# EAGLE board Launch_Tower_Ignition_Board_v6-2 (EAGLE 6.2)
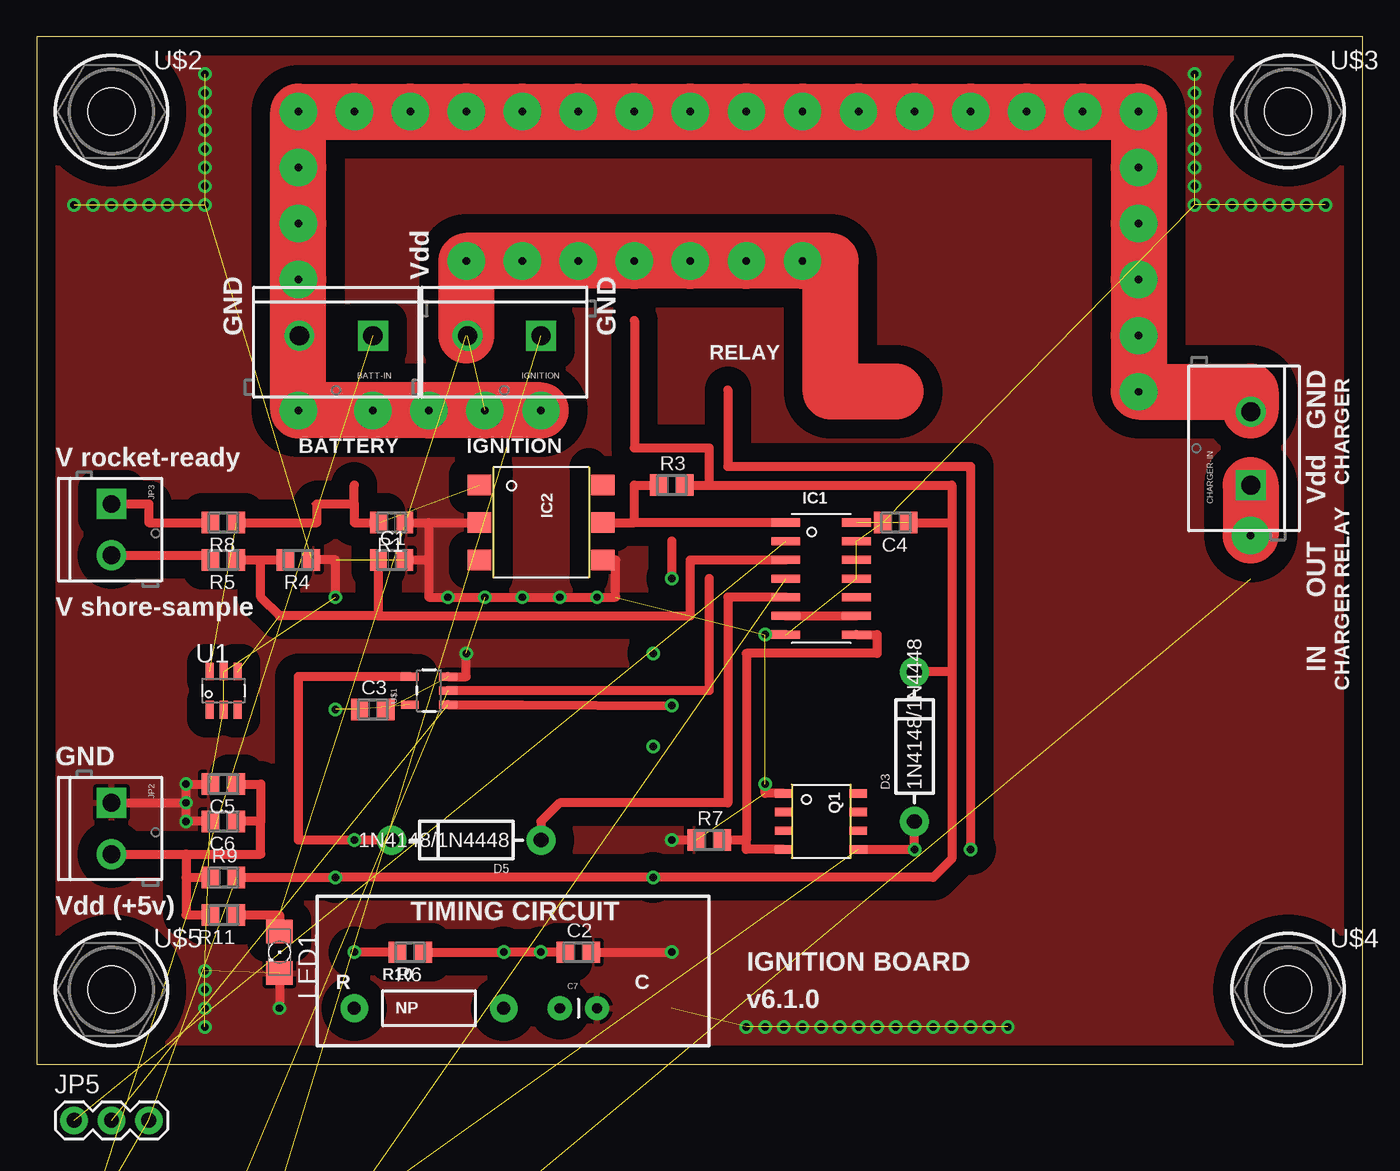
[diagram p0: board, top side]
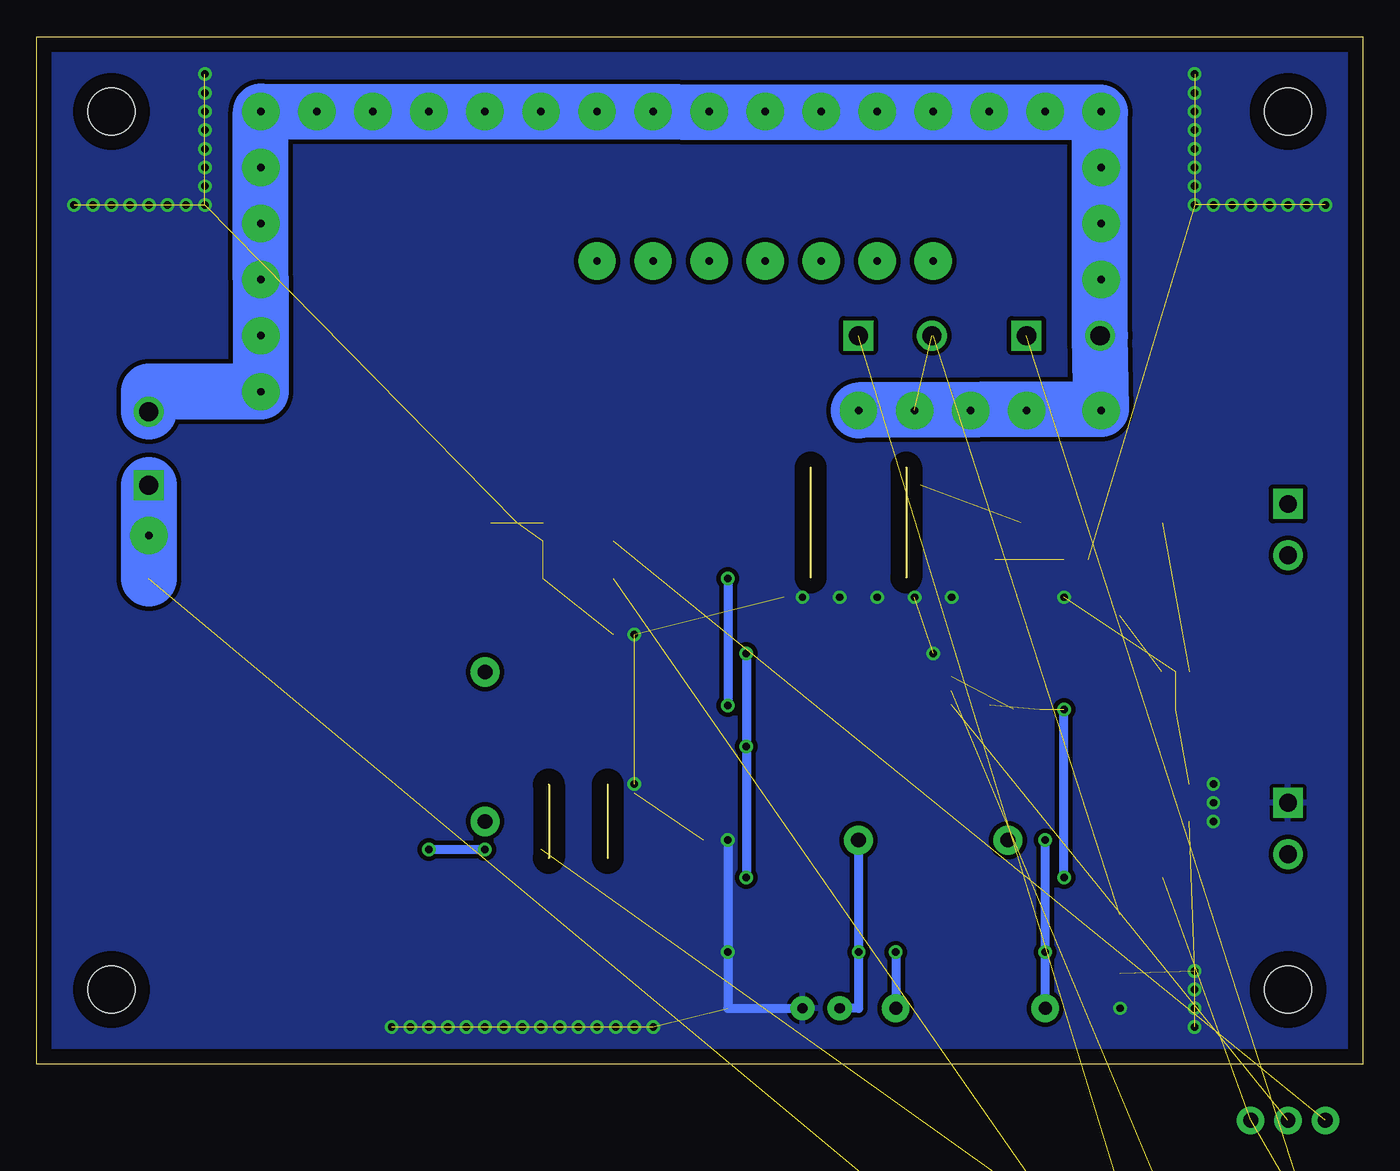
[diagram p1: board, bottom side, seen from below]

Size 90.17 x 69.85 mm. Coordinates in mm from the lower left corner, seen from the top.
Outline: 0,0 90.17,0 90.17,69.85 0,69.85 0,0
Copper layers (1*16): Top 0.035mm / dielectric 1.5mm / Bottom 0.035mm
Design rules: minimum track width 10mil, minimum drill 24mil, track to track 8mil, track to pad 8mil, pad to pad 8mil, via to via 8mil, smd to smd 8mil, copper to edge 40mil, drill to drill 8mil, minimum pad ring 10mil, minimum via ring 8mil, stop-mask expansion 4mil, vias tented up to drill 0mil, thermal gap 10mil

## Footprints (pad centres in the part's own frame; a part is rotated, then mirrored left to right if it is on the bottom)
SCREWTERMINAL-5MM-2 = drill 1.3 pad 2.032 square: 1 0,0 | drill 1.3 pad 2.032: 2 5,0
0805-B-NOSILK = smd 1.15 x 1.45: 1 -0.9,0; 2 0.9,0
CAP-PTH-SMALL = drill 0.7 pad 1.651: 1 0,0; 2 2.54,0
DIODE-1N4001 = drill 1 pad 1.981: A -5.08,0; C 5.08,0
INVERTSOIC14 = smd 0.55 x 1.95: 1 -3.81,-2.4; 2 -2.54,-2.4; 3 -1.27,-2.4; 4 0,-2.4; 5 1.27,-2.4; 6 2.54,-2.4; 7 3.81,-2.4; 8 3.81,2.4; 9 2.54,2.4; 10 1.27,2.4; 11 0,2.4; 12 -1.27,2.4; 13 -2.54,2.4; 14 -3.81,2.4
4N35-300E = smd 1.4 x 1.6: 1 -2.54,-4.2; 2 0,-4.2; 3 2.54,-4.2; 4 2.54,4.2; 5 0,4.2; 6 -2.54,4.2
1X03 = drill 1.016 pad 1.88: 1 0,0; 2 2.54,0; 3 5.08,0
SCREWTERMINAL-3.5MM-2 = drill 1.2 pad 2.032 square: 1 0,0 | drill 1.2 pad 2.032: 2 3.5,0
FKIT-LED-1206 = smd 1.6 x 1.803: A -1.422,0; C 1.422,0
FETSO-8 = smd 0.559 x 1.194: 1 -1.905,-2.527; 2 -0.635,-2.527; 3 0.635,-2.527; 4 1.905,-2.527; 5 1.905,2.527; 6 0.635,2.527; 7 -0.635,2.527; 8 -1.905,2.527
AXIAL-0.4 = drill 0.9 pad 1.88: P$1 -5.08,0; P$2 5.08,0
SOT23-6L = smd 0.55 x 1.2: 1 -0.95,-1.3; 2 0,-1.3; 3 0.95,-1.3; 4 0.95,1.3; 5 0,1.3; 6 -0.95,1.3
SOT23-5 = smd 0.55 x 1.2: 1 -0.95,-1.3; 2 0,-1.3; 3 0.95,-1.3; 4 0.95,1.3; 5 -0.95,1.3
#4/.300-BARE+STD_NUT_OR_STAR_WASHER = hole 3.175: 0,0
G5LA = drill 0.8 square: PIN1 -8.5,0; PIN2 -6.5,5.9; PIN3 5.7,5.9; PIN4 5.7,-6.1; PIN5 -6.5,-6.1

## Placement (x,y rotation side)
BATT-IN  5MM screw  [SCREWTERMINAL-5MM-2]  22.86,49.53 180 top
C1  .1uF  [0805-B-NOSILK]  24.13,34.29 0 top
C2  1uF  [0805-B-NOSILK]  36.83,7.62 0 top
C3  0.1uF  [0805-B-NOSILK]  22.86,24.13 0 top
C4  0.1uF  [0805-B-NOSILK]  58.42,36.83 180 top
C5  10  [0805-B-NOSILK]  12.7,19.05 180 top
C6  0.01  [0805-B-NOSILK]  12.7,16.51 180 top
C7  NP  [CAP-PTH-SMALL]  35.56,3.81 0 top
CHARGER-IN  5MM screw  [SCREWTERMINAL-5MM-2]  82.55,39.37 90 top
D3  1N4148/1N4448  [DIODE-1N4001]  59.69,21.59 90 top
D5  1N4148/1N4448  [DIODE-1N4001]  29.21,15.24 180 top
IC1  INVERT GATES  [INVERTSOIC14]  53.34,33.02 270 top
IC2  OPTOISOLATOR  [4N35-300E]  34.29,36.83 270 top
IGNITION  5MM screw  [SCREWTERMINAL-5MM-2]  34.29,49.53 180 top
JP1  JUMPER-3PTH  [1X03]  2.54,-29.21 0 top  (outside the outline)
JP2  3.5MM screw  [SCREWTERMINAL-3.5MM-2]  5.08,17.78 270 top
JP3  3.5MM screw  [SCREWTERMINAL-3.5MM-2]  5.08,38.1 270 top
JP5  JUMPER-3PTH  [1X03]  2.54,-3.81 0 top  (outside the outline)
LED1  [FKIT-LED-1206]  16.51,7.62 270 top
Q1  NMOSFET  [FETSO-8]  53.34,16.51 270 top
R1  10k  [0805-B-NOSILK]  24.13,36.83 180 top
R3  10k  [0805-B-NOSILK]  43.18,39.37 0 top
R4  10k  [0805-B-NOSILK]  17.78,34.29 180 top
R5  2.6k  [0805-B-NOSILK]  12.7,34.29 180 top
R6  1M  [0805-B-NOSILK]  25.4,7.62 180 top
R7  10k  [0805-B-NOSILK]  45.72,15.24 0 top
R8  350  [0805-B-NOSILK]  12.7,36.83 180 top
R9  0  [0805-B-NOSILK]  12.7,12.7 0 top
R10  NP  [AXIAL-0.4]  26.67,3.81 0 top
R11  0k  [0805-B-NOSILK]  12.7,10.16 180 top
U1  SN65220DBV  [SOT23-6L]  12.7,25.4 0 top
U$1  AND GATE  [SOT23-5]  26.67,25.4 90 top
U$2  #4-BARE_MOUNTING_HOLE/.300  [#4/.300-BARE+STD_NUT_OR_STAR_WASHER]  5.08,64.77 0 top
U$3  #4-BARE_MOUNTING_HOLE/.300  [#4/.300-BARE+STD_NUT_OR_STAR_WASHER]  85.09,64.77 0 top
U$4  #4-BARE_MOUNTING_HOLE/.300  [#4/.300-BARE+STD_NUT_OR_STAR_WASHER]  85.09,5.08 0 top
U$5  #4-BARE_MOUNTING_HOLE/.300  [#4/.300-BARE+STD_NUT_OR_STAR_WASHER]  5.08,5.08 0 top
U$6  RELAY-2  [G5LA]  10.16,-16.51 0 top  (outside the outline)

## Library data of the parts
BATT-IN C7 CHARGER-IN D3 D5 IGNITION JP1-JP3 JP5 LED1 R10 U$1 = SparkFun
C1-C6 R1 R3-R9 R11 = rcl_custom
IC1 IC2 Q1 U$6 = launch-tower
U1 = sn65220
U$2-U$5 = mount

## Nets
BATT-CHARG-RELAY: CHARGER-IN.1 U$6.PIN4
GND: C1.2 C2.2 C3.2 C4.2 C5.2 C6.2 C7.2 IC1.7 IC1.11 IC1.13 IC2.2 IC2.4 JP2.1 LED1.C Q1.1 R1.1 R4.1 R7.1 U1.2 U1.5 U$1.3
GND-BATT: BATT-IN.2 CHARGER-IN.2 IGNITION.2
N$1: JP1.2 U$1.2
N$2: LED1.A R11.1
N$3: IC1.1 IC2.5 R3.1
N$4: JP3.1 R8.2
N$5: JP5.2 U$1.1
N$6: IC1.4 JP1.3
N$7: C1.1 IC1.3 R4.2 R5.1 U1.4
N$9: D3.A Q1.5 U$6.PIN5
N$10: IC1.8 Q1.4 R7.2
N$11: IC1.2 JP5.1
N$12: C5.1 C6.1 JP2.2 R9.1 R11.2
N$13: D5.C R6.2 R10.P$1 U$1.4
N$15: C2.1 C7.1 D5.A IC1.5 R6.1 R10.P$2
N-NOT2: IC1.6 IC1.9
ROCKET-READY: IC2.1 R1.2 R8.1 U1.6
VCC-BATT: BATT-IN.1 U$6.PIN1
VCC-IGNITION: IGNITION.1 U$6.PIN3
VDD: C3.1 C4.1 D3.C IC1.14 JP1.1 JP5.3 R3.2 R9.2 U$1.5 U$6.PIN2
VSAMPLE: JP3.2 R5.2

## Tracks (layer width: path | path; a pad name or v marks a point on that pad's centre or on a via)
BATT-CHARG-RELAY  (via drill 0.51 pad 2.54)  (1 unrouted)
  Top 3.81: CHARGER-IN.1 v82.55,35.94
  Bottom 3.81: CHARGER-IN.1 v82.55,35.94 82.55,33.02
GND  (via drill 0.51)  (62 unrouted)
  Top 0.61: IC1.7 v49.53,29.21 | U$1.3 29.21,26.35 v29.21,27.94 | Q1.1 49.53,18.41 v49.53,19.05 | v20.32,31.75 20.32,34.29 R4.1 | JP2.1 v10.16,17.78 | v10.16,17.78 v10.16,19.05 C5.2 | C6.2 v10.16,16.51 v10.16,17.78 | C2.2 v43.18,7.62 | R1.1 26.67,36.83 | 26.67,36.83 IC2.2 | C1.2 26.67,34.29 | 26.67,34.29 26.67,31.75 v27.94,31.75 v30.48,31.75 v33.02,31.75 v35.56,31.75 v38.1,31.75 39.37,31.75 39.37,34.29 IC2.4 | 26.67,34.29 26.67,36.83 | LED1.C v16.51,3.81 | R7.1 v43.18,15.24
  Bottom 0.61: C7.2 43.18,3.81 v43.18,7.62 v43.18,15.24
  other vias: 66.04,2.54 64.77,2.54 63.5,2.54 62.23,2.54 60.96,2.54 59.69,2.54 58.42,2.54 57.15,2.54 55.88,2.54 54.61,2.54 53.34,2.54 52.07,2.54 50.8,2.54 49.53,2.54 48.26,2.54 78.74,67.31 78.74,66.04 78.74,64.77 78.74,63.5 78.74,62.23 78.74,60.96 78.74,59.69 78.74,58.42 80.01,58.42 81.28,58.42 82.55,58.42 83.82,58.42 85.09,58.42 86.36,58.42 87.63,58.42 11.43,67.31 11.43,66.04 11.43,64.77 11.43,63.5 11.43,62.23 11.43,60.96 11.43,59.69 11.43,58.42 10.16,58.42 8.89,58.42 7.62,58.42 6.35,58.42 5.08,58.42 3.81,58.42 2.54,58.42 11.43,2.54 11.43,3.81 11.43,5.08 11.43,6.35
  pour Top (isolate 1.27): 0,69.85 90.17,69.85 90.17,0 0,0
  pour Bottom (isolate 0.305): 0,69.85 90.17,69.85 90.17,0 0,0
GND-BATT  (via drill 0.51 pad 2.54)  (1 unrouted)
  Top 3.81: v34.29,44.45 v30.48,44.45 v26.67,44.45 v22.86,44.45 v17.78,44.45 v17.78,53.34 v17.78,57.15 v17.78,60.96 v17.78,64.77 v21.59,64.77 v25.4,64.77 v29.21,64.77 v33.02,64.77 v36.83,64.77 v40.64,64.77 v44.45,64.77 v48.26,64.77 v52.07,64.77 v55.88,64.77 v59.69,64.77 v63.5,64.77 v67.31,64.77 v71.12,64.77 v74.93,64.77 v74.93,60.96 v74.93,57.15 v74.93,53.34 v74.93,49.53 v74.93,45.72 82.55,45.72 82.55,44.45
  Bottom 3.81: v34.29,44.45 17.78,44.53 BATT-IN.2 17.86,64.69 v74.93,64.77 v74.93,53.34 v74.93,49.53 v74.93,45.72 82.55,45.72 CHARGER-IN.2
N$1  (1 unrouted)
  Top 0.61: 45.72,33.02 45.72,25.4 33.02,25.4 U$1.2
N$2  (via drill 0.51 pad 2.54)  (1 unrouted)
  Top 0.61: R11.1 16.51,10.16 LED1.A
  Top 3.81: 58.42,45.72 53.98,45.72 53.98,54.61 v52.07,54.61 v48.26,54.61 v44.45,54.61 v40.64,54.61 v36.83,54.61 v33.02,54.61 v29.21,54.61 29.21,49.53
N$3
  Top 0.61: IC2.5 40.64,36.83 | 40.64,36.83 40.64,39.37 R3.1 | IC1.1 40.64,36.83
N$4
  Top 0.61: JP3.1 7.62,38.1 7.62,36.83 R8.2
N$5  (via drill 0.51)  (1 unrouted)
  Top 0.61: 43.18,35.56 v43.18,33.02 | U$1.1 33.02,24.43 | 33.02,24.43 v43.18,24.38 | 33.02,24.43
  Bottom 0.61: v43.18,33.02 v43.18,24.38
N$6  (1 unrouted)
N$7  (1 unrouted)
  Top 0.61: R5.1 15.24,34.29 | 15.24,34.29 R4.2 | 23.23,30.48 16.51,30.48 15.24,31.75 15.24,34.29 | 23.23,30.48 C1.1 | 23.23,30.48 44.45,30.48 44.45,34.29 IC1.3
N$9  (via drill 0.51)  (1 unrouted)
  Top 0.61: Q1.5 v59.69,14.61 D3.A | 46.99,45.85 46.99,40.64 63.5,40.64 v63.5,14.61
  Bottom 0.61: v63.5,14.61 v59.69,14.61
N$10
  Top 0.61: IC1.8 57.15,29.21 57.15,27.94 48.26,27.94 48.26,15.24 | 48.26,15.24 R7.2 | Q1.4 48.26,14.61 48.26,15.24
N$11  (1 unrouted)
N$12
  Top 0.61: C5.1 15.24,19.05 15.24,16.51 | 15.24,16.51 C6.1 | JP2.2 10.16,14.28 | 10.16,14.28 10.16,12.7 | 10.16,12.7 R9.1 | 10.16,14.28 15.24,14.28 15.24,16.51 | 10.16,12.7 10.16,10.16 R11.2
N$13  (via drill 0.51)
  Top 0.61: D5.C v21.59,15.24 17.78,15.24 17.78,26.35 U$1.4 | R6.2 v21.59,7.62
  Bottom 0.61: v21.59,15.24 v21.59,7.62 R10.P$1
N$15  (via drill 0.51)
  Top 0.61: IC1.5 46.99,31.75 46.99,17.78 35.56,17.78 34.29,16.51 D5.A | C2.1 v34.29,7.62 v31.75,7.62 R6.1
  Bottom 0.61: D5.A v34.29,7.62 34.29,3.81 C7.1 | v31.75,7.62 R10.P$2
N-NOT2
  Top 0.61: IC1.6 IC1.9
ROCKET-READY  (2 unrouted)
  Top 0.254: 18.8,38.1 19.05,38.1
  Top 0.61: 21.59,38.1 21.59,36.83 R1.2 | 21.59,38.1 19.05,38.1 19.05,36.83 R8.1 | 21.59,38.1 21.59,39.37
VCC-BATT  (1 unrouted)
VCC-IGNITION  (1 unrouted)
VDD  (via drill 0.51)  (6 unrouted)
  Top 0.61: R3.2 45.72,39.37 | 45.72,39.37 62.23,39.37 62.23,36.83 | 62.23,36.83 62.23,26.67 | 62.23,26.67 62.23,13.97 60.96,12.7 v41.91,12.7 v20.32,12.7 R9.2 | 62.23,26.67 D3.C | C4.1 62.23,36.83 | 40.64,50.55 40.64,41.91 45.72,41.91 45.72,39.37
  Bottom 0.61: v20.32,12.7 v20.32,24.13 | v41.91,27.94 v41.91,21.59 v41.91,12.7
VSAMPLE
  Top 0.254: 11.8,34.6 R5.2
  Top 0.61: JP3.2 11.8,34.6

## Text on the board
tPlace: Vdd | GND | GND | RELAY | GND | BATTERY | IGNITION | V rocket-ready | CHARGER | Vdd | OUT | V shore-sample | IN | CHARGER RELAY | GND | Vdd (+5v) | TIMING CIRCUIT | IGNITION BOARD | R | C | v6.1.0